# EAGLE board SensorBoard (4) (EAGLE 6.5.0)
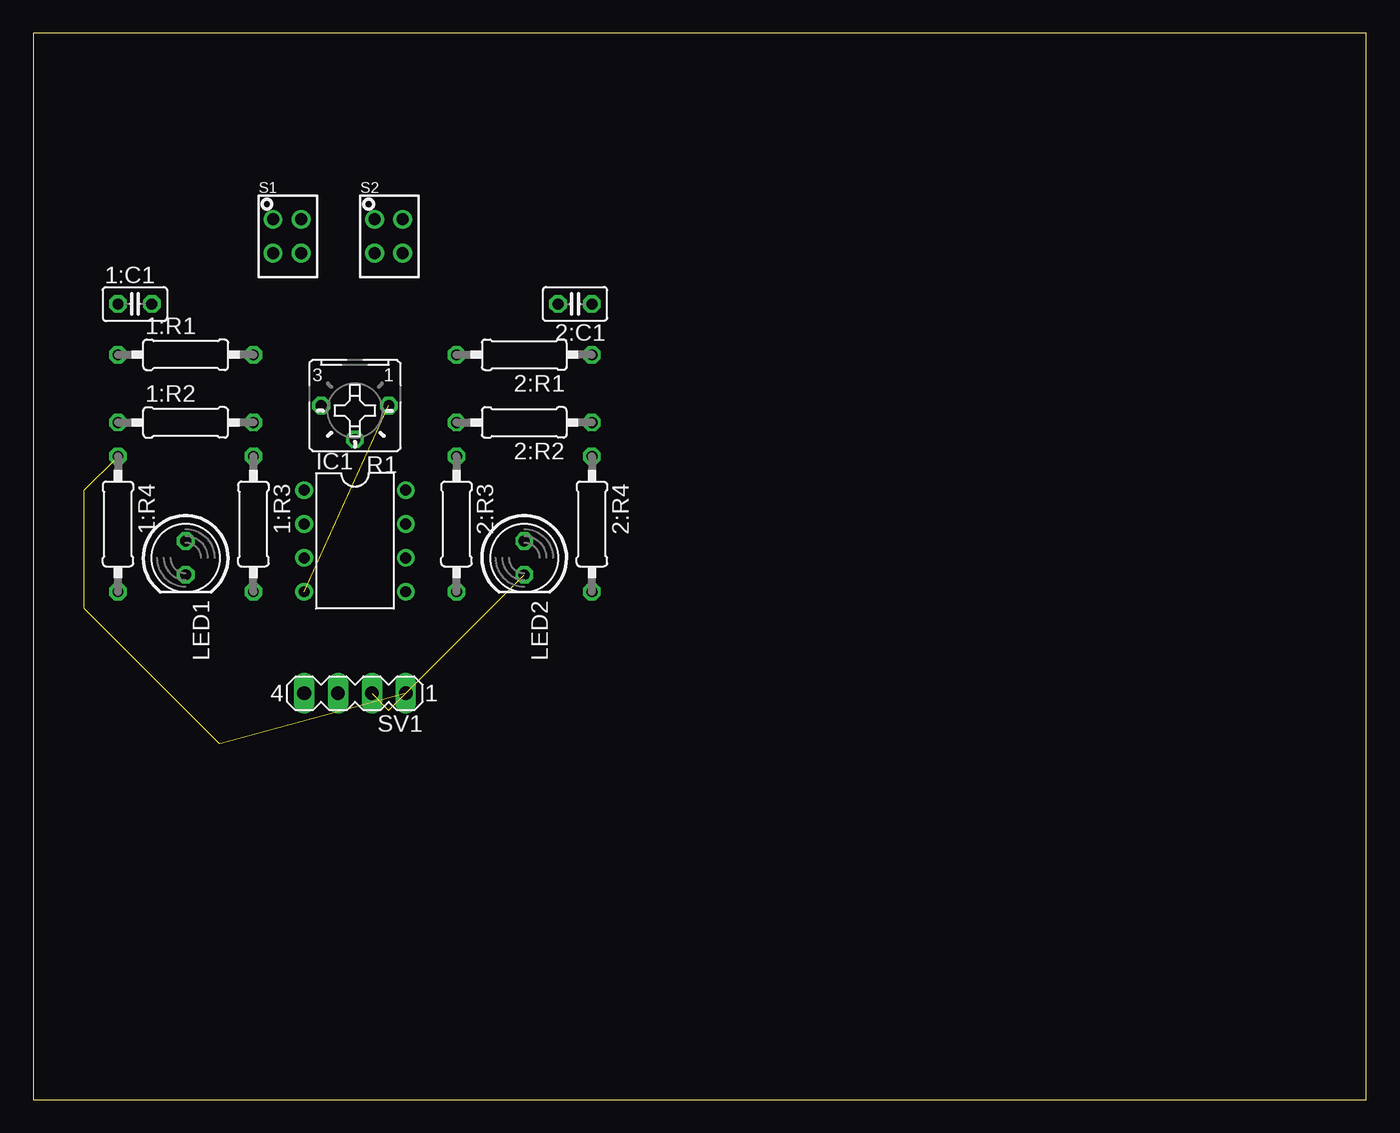
[diagram p0: board, top side]
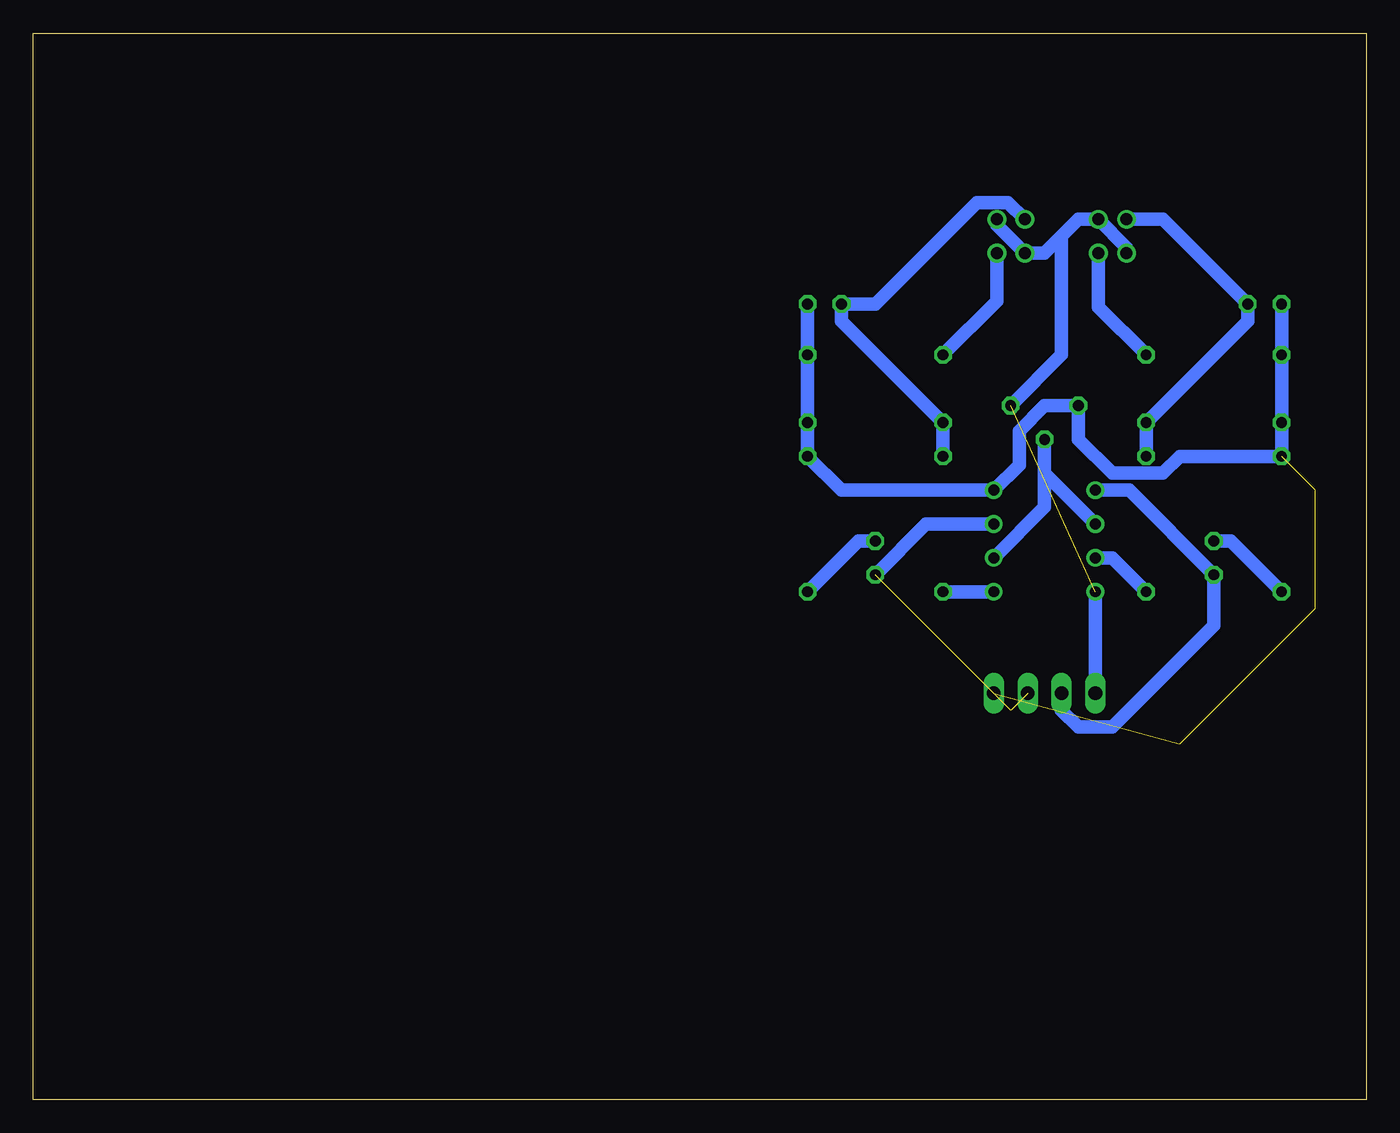
[diagram p1: board, bottom side, seen from below]

Size 100 x 80 mm. Coordinates in mm from the lower left corner, seen from the top.
Outline: 0,0 100,0 100,80 0,80 0,0
Copper layers (1*16): Top 0.035mm / dielectric 1.5mm / Bottom 0.035mm
Design rules "default": minimum track width 10mil, minimum drill 24mil, track to track 8mil, track to pad 8mil, pad to pad 8mil, via to via 8mil, smd to smd 8mil, copper to edge 40mil, drill to drill 8mil, minimum pad ring 10mil, minimum via ring 8mil, stop-mask expansion 4mil, vias tented up to drill 0mil, thermal gap 10mil

## Footprints (pad centres in the part's own frame; a part is rotated, then mirrored left to right if it is on the bottom)
C025-025X050 = drill 0.813 octagon: 1 -1.27,0; 2 1.27,0
0207/10 = drill 0.813 octagon: 1 -5.08,0; 2 5.08,0
DIL08 = drill 0.813 pad 1.27: 1 -3.81,-3.81; 2 -1.27,-3.81; 3 1.27,-3.81; 4 3.81,-3.81; 5 3.81,3.81; 6 1.27,3.81; 7 -1.27,3.81; 8 -3.81,3.81
LED5MM = drill 0.813 octagon: A -1.27,0; K 1.27,0
B25P = drill 0.813 octagon: A -2.54,0; E 2.54,0; S 0,2.54
QRD1114 = drill 0.9: 1 -1.067,1.27; 2 -1.067,-1.27; 3 1.041,-1.27; 4 1.041,1.27
MA04-1 = drill 1.016 long: 1 -3.81,0; 2 -1.27,0; 3 1.27,0; 4 3.81,0

## Placement (x,y rotation side)
1:C1  0.01uF  [C025-025X050]  7.62,59.69 0 top
1:R1  470R  [0207/10]  11.43,55.88 0 top
1:R2  10K  [0207/10]  11.43,50.8 0 top
1:R3  220R  [0207/10]  16.51,43.18 270 top
1:R4  270R  [0207/10]  6.35,43.18 270 top
2:C1  0.01uF  [C025-025X050]  40.64,59.69 180 top
2:R1  470R  [0207/10]  36.83,55.88 180 top
2:R2  10K  [0207/10]  36.83,50.8 180 top
2:R3  220R  [0207/10]  31.75,43.18 270 top
2:R4  270R  [0207/10]  41.91,43.18 270 top
IC1  LM393N  [DIL08]  24.13,41.91 270 top
LED1  [LED5MM]  11.43,40.64 270 top
LED2  [LED5MM]  36.83,40.64 270 top
R1  20K  [B25P]  24.13,52.07 180 top
S1  QRD1114  [QRD1114]  19.05,64.77 0 top
S2  QRD1114  [QRD1114]  26.67,64.77 0 top
SV1  [MA04-1]  24.13,30.48 180 top

## Library data of the parts
1:C1 1:R1-1:R4 2:C1 2:R1-2:R4 = resistor
IC1 = linear
LED1 LED2 = led
R1 = pot
S1 S2 = SparkFun-Sensors
SV1 = con-lstb; OC_FARNELL: unknown; OC_NEWARK: unknown

## Nets
GND: IC1.4 R1.A S1.2 S1.4 S2.2 S2.4 SV1.4
N$1: 2:R4.2 LED2.A
N$2: 1:C1.2 1:R2.2 1:R3.1 S1.1
N$3: 1:R1.2 S1.3
N$4: 2:C1.2 2:R2.2 2:R3.1 S2.1
N$5: 2:R1.2 S2.3
N$6: 1:R4.2 LED1.A
OUT1: IC1.1 LED1.K SV1.3
OUT2: IC1.7 LED2.K SV1.2
POT: IC1.2 IC1.6 R1.S
SIG1: 1:R3.2 IC1.3
SIG2: 2:R3.2 IC1.5
V+: 1:C1.1 1:R1.1 1:R2.1 1:R4.1 2:C1.1 2:R1.1 2:R2.1 2:R4.1 IC1.8 R1.E SV1.1

## Tracks (layer width: path | path; a pad name or v marks a point on that pad's centre or on a via)
GND  (1 unrouted)
  Bottom 1.016: S1.2 17.98,63.93 S1.4 21.59,66.04 22.86,64.77 | S2.4 27.71,65.61 S2.2 24.13,63.5 22.86,64.77 | R1.A 22.86,55.88 22.86,64.77 | IC1.4 SV1.4
N$1
  Bottom 1.016: 2:R4.2 38.1,41.91 LED2.A
N$2
  Bottom 1.016: 1:R3.1 1:R2.2 8.89,58.42 1:C1.2 15.24,66.04 S1.1
N$3
  Bottom 1.016: S1.3 20.09,59.46 1:R1.2
N$4
  Bottom 1.016: 2:R3.1 2:R2.2 39.37,58.42 2:C1.2 36.83,59.69 29.21,67.31 26.87,67.31 S2.1
N$5
  Bottom 1.016: S2.3 27.71,59.92 2:R1.2
N$6
  Bottom 1.016: 1:R4.2 10.16,41.91 LED1.A
OUT1
  Bottom 1.016: IC1.1 17.78,45.72 LED1.K 11.43,35.56 19.05,27.94 21.59,27.94 22.86,29.21 SV1.3
OUT2  (2 unrouted)
  Bottom 1.016: IC1.7 33.02,43.18 LED2.K
POT
  Bottom 1.016: R1.S 24.13,46.99 | 24.13,46.99 24.13,44.45 IC1.6 | IC1.2 24.13,46.99
SIG1
  Bottom 1.016: 1:R3.2 19.05,40.64 IC1.3
SIG2
  Bottom 1.016: IC1.5 2:R3.2
V+  (4 unrouted)
  Bottom 1.016: 1:C1.1 1:R1.1 1:R2.1 1:R4.1 13.97,48.26 15.24,46.99 19.05,46.99 21.59,49.53 R1.E 24.13,52.07 26.04,50.16 26.04,47.62 IC1.8 39.37,45.72 2:R4.1 2:R2.1 2:R1.1 2:C1.1